# Allegro board Arduino_board.brd
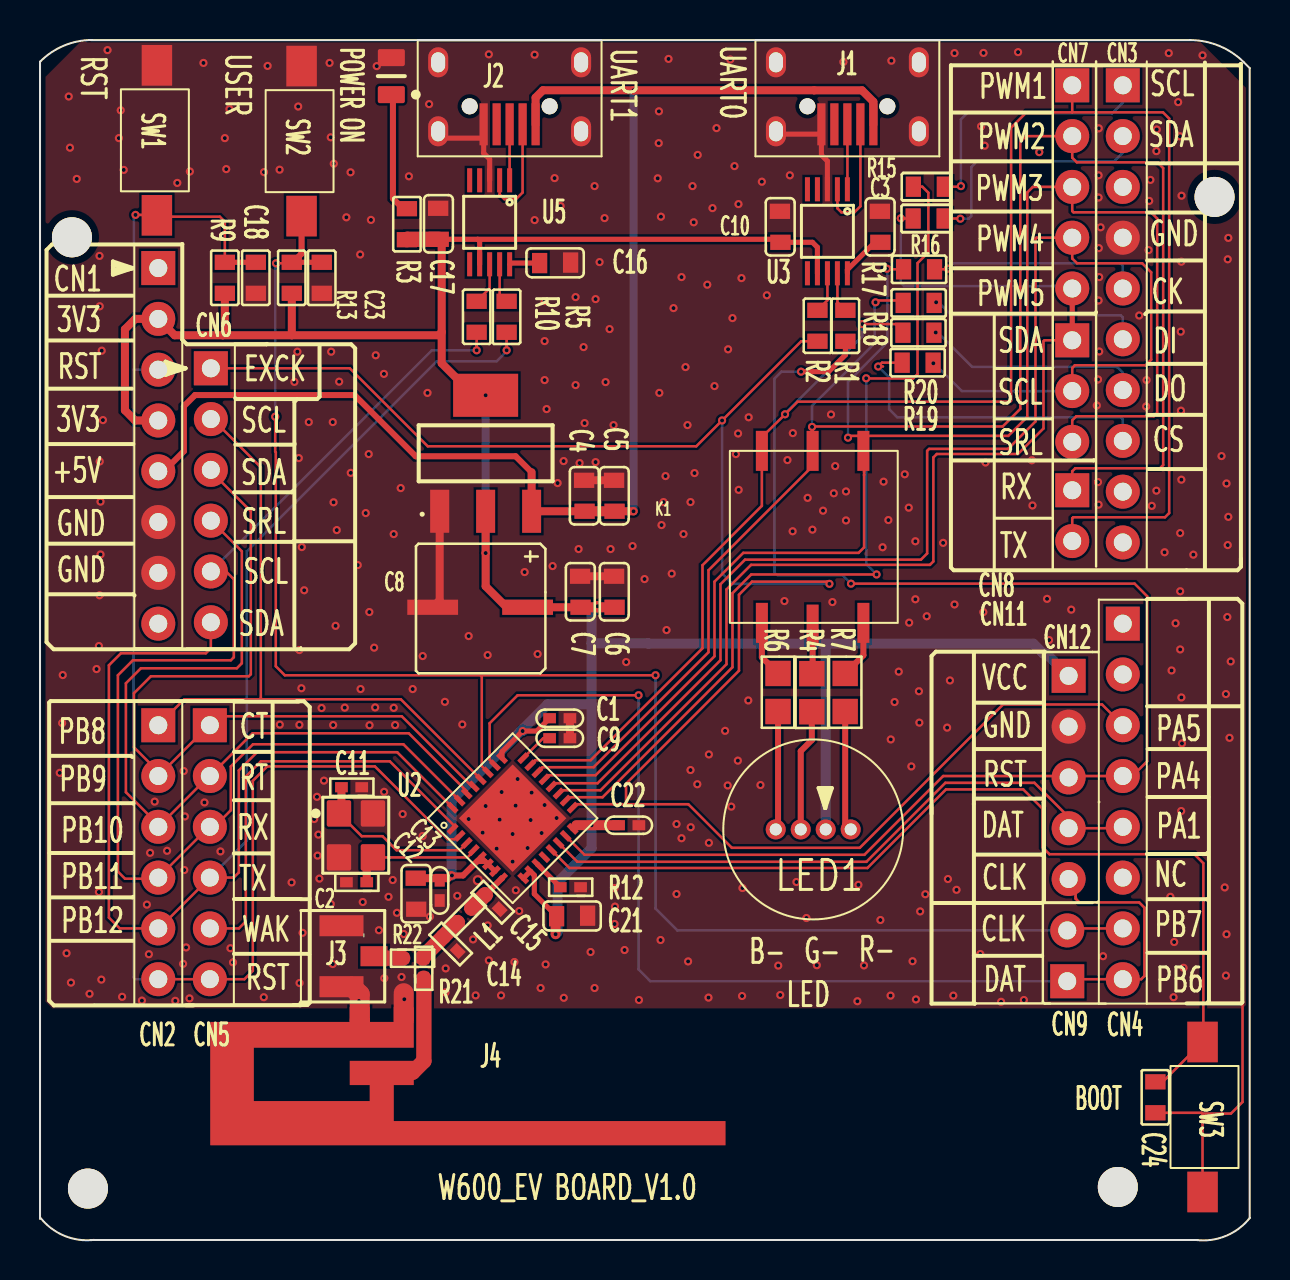
[diagram p0: board, top side]
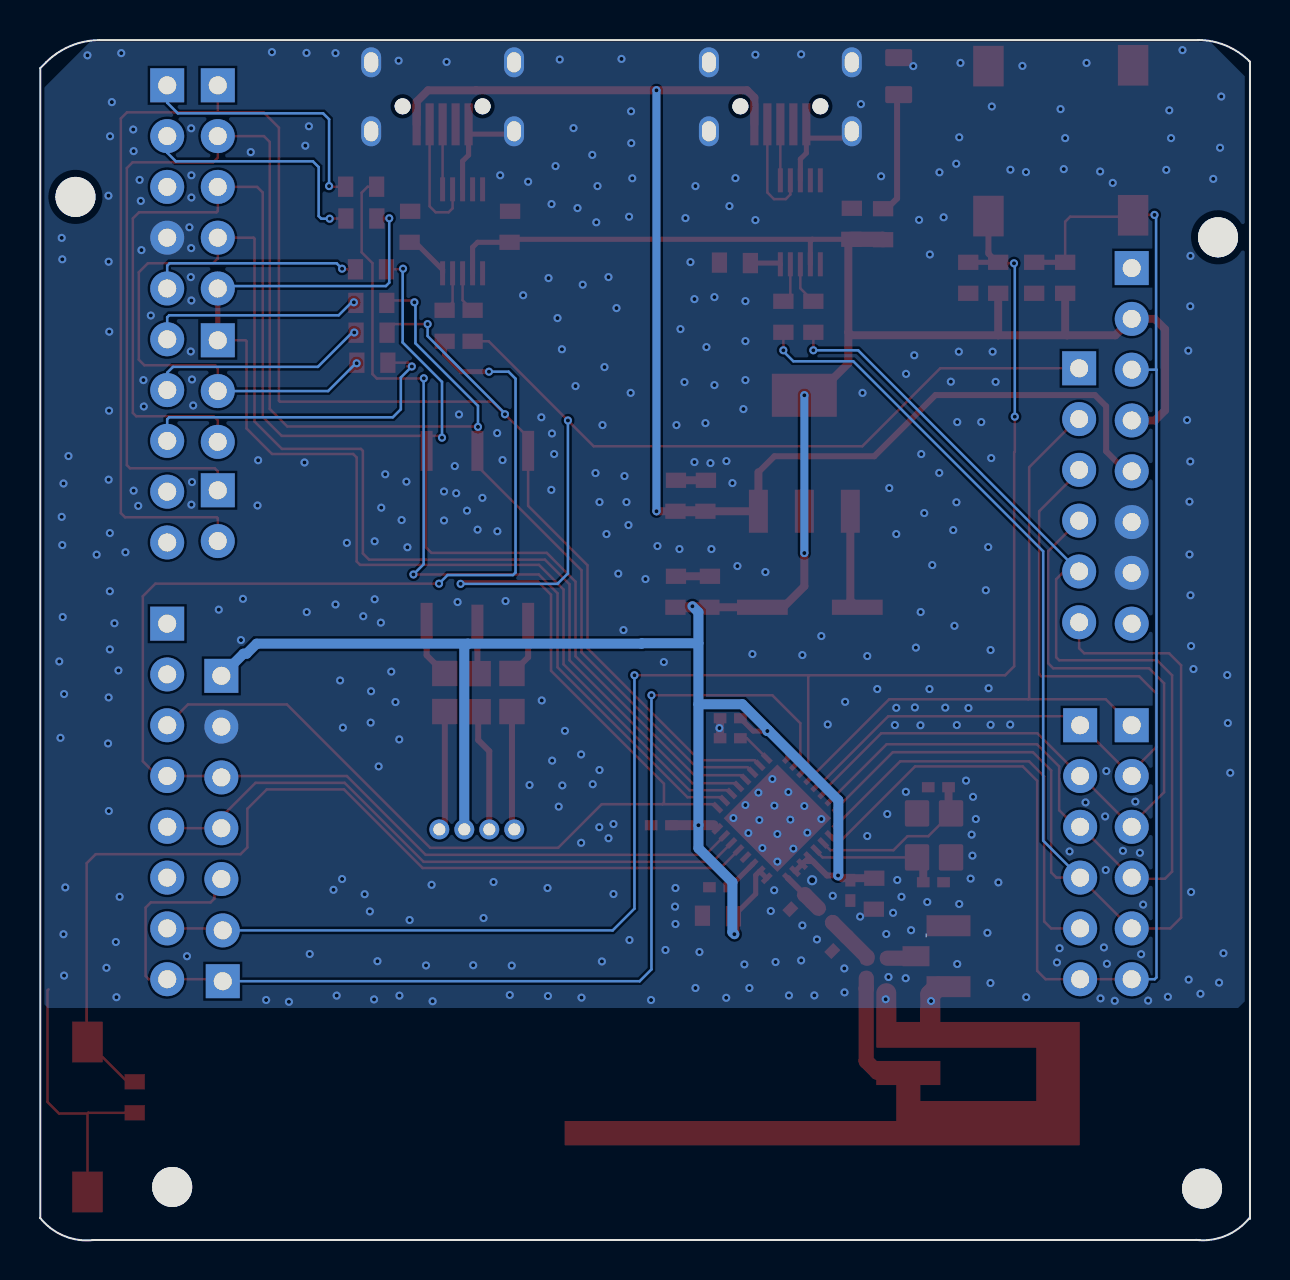
[diagram p1: board, bottom side, seen from below]

Outline 60.55 x 60.01 mm; copper layers: TOP, BOTTOM. Coordinates in mm from the lower left corner of the outline.
Outline path: 0,1.06 arc(0,1.07) 0,1.07 0,58.92 0.02,58.94 arc(1.21,59.73) 2.61,60.01 ; 2.55,60 57.55,60 arc(59.01,59.71) 60.25,58.88 60.53,58.6 60.53,1.09 ; 2.71,0.01 arc(1.22,0.21) 0.01,1.12 ; 2.55,0 57.93,0 ; 57.45,0 57.85,0 arc(59.34,0.21) 60.55,1.12

## Placement (name value [footprint] x y rotation side)
C1  1uF  [C0402]  25.5 26.09 0 top
C2  15pF  [R0402]  16.35 17.89 180 top
C3  1uF  [C0603]  42.05 49.89 90 top
C4  10uF  [C0603]  27.25 36.44 90 top
C5  1uF  [C0603]  28.75 36.44 90 top
C6  10uF  [C0603]  28.75 31.64 90 top
C7  0.1uF  [C0603]  27.05 31.64 90 top
C8  330uF  [C6_11]  24.4 31.64 270 top
C9  1uF  [C0402]  25.5 25.09 0 top
C10  1uF  [C0603]  37.05 49.89 90 top
C11  15pF  [R0402]  16.1 22.64 180 top
C12  10uF  [C0603]  18.8 18.09 270 top
C13  4.7nF  [C0402]  20 17.99 270 top
C14  0.75pF  [R0402]  20.9 14.45 135 top
C15  0.75pF  [R0402]  23 16.54 135 top
C16  1uF  [C0603]  25 48.85 0 top
C17  1uF  [C0603]  19.95 50.04 90 top
C18  0.1uF  [R0603]  10.8 47.34 90 top
C21  47uF  [C0603]  25.85 16.19 0 top
C22  1uF  [C0402]  28.95 20.74 0 top
C23  0.1uF  [R0603]  14.1 47.34 90 top
C24  0.1uF  [R0603]  55.81 6.36 90 top
CN1  8HEADER  [HDR254M-1X8]  5.92 48.6 270 top
CN2  6 HEADER  [HDR254M-1X6]  5.92 25.74 270 top
CN3  CON10  [HDR254M-1X10]  54.18 57.74 270 top
CN4  8 HEADER  [HDR254M-1X8]  54.18 30.82 270 top
CN5  6 HEADER  [HDR254M-1X6]  8.5 25.74 270 top
CN6  6 HEADER  [HDR254M-1X6]  8.55 43.59 270 top
CN7  CON5  [HDR254M-1X5]  51.65 57.74 270 top
CN8  CON3  [HDR254M-1X3]  51.65 44.99 270 top
CN9  CON2  [HDR254M-1X2]  51.4 12.94 90 top
CN11  CON2  [HDR254M-1X2]  51.65 37.49 270 top
CN12  CON5  [HDR254M-1X5]  51.47 28.21 270 top
D1  LED  [LEDC2012X120]  17.58 58.2 90 top
J1  micro USB  [MICRO-USB]  40.4 55.79 180 top
J2  micro USB  [MICRO-USB]  23.5 55.79 180 top
J3  -  [TC35]  15.85 14.19 180 top
J4  TC35  [IFA_TI1]  21.41 8.19 180 top
K1  SWITCH_3  [SWITCH3_2]  36.12 39.46 0 top
L1  2.2nH  [R0402]  21.6 16.59 225 top
LED1  RGB  [RGB_LED]  38.69 20.53 180 top
NOREF  -  [unnamed]  1.6 50.14 0 top
NOREF#2  -  [unnamed]  58.77 52.16 0 top
NOREF#3  -  [unnamed]  2.4 2.57 0 top
NOREF#4  -  [unnamed]  53.93 2.65 0 top
R1  33  [R0603]  40.3 44.94 90 top
R2  33  [R0603]  38.9 46.49 270 top
R3  1.5K  [R0603]  18.36 51.57 270 top
R4  15R  [R0805]  38.62 28.32 270 top
R5  33  [R0603]  23.35 45.39 90 top
R6  15R  [R0805]  36.93 28.33 270 top
R7  15R  [R0805]  40.29 28.33 270 top
R9  4.7K  [R0603]  9.25 47.34 90 top
R10  33  [R0603]  21.85 46.94 270 top
R12  24K_1%  [R0402]  27.05 17.64 180 top
R13  4.7K  [R0603]  12.6 47.34 90 top
R15  1.5K  [R0603]  45.25 52.67 180 top
R16  1.5K  [R0603]  45.24 51.08 180 top
R17  1.5K  [R0603]  44.76 48.54 180 top
R18  1.5K  [R0603]  44.74 46.86 180 top
R19  1.5K  [R0603]  43.14 43.87 0 top
R20  1.5K  [R0603]  44.73 45.37 180 top
R21  000  [R0402]  19.2 13.09 90 top
R22  000  [R0402]  18.15 14.09 0 top
SW1  SW PUSHBUTTON  [SW4]  5.85 51.24 90 top
SW2  SW PUSHBUTTON  [SW4]  13.09 51.2 90 top
SW3  SW PUSHBUTTON  [SW4]  58.17 9.9 270 top
U1  W600_32pin  [W600-QFN32]  23.65 21.09 45 top
U2  XTAL_40MHz  [OSCCC250X320X110]  15.95 20.04 0 top
U3  CH340E  [MSOP10]  40.4 52.54 270 top
U4  AMS117  [SOT-223]  22.3 39.34 0 top
U5  CH340E  [MSOP10]  23.5 52.99 270 top

## Library data of the parts
C1-C7 C9-C18 C21-C24 = CAP NP
C8 = C_0: room: PWR
CN1 CN4 = CON8
CN2 CN5 CN6 = CON6
CN3 = CON10
CN7 CN12 = CON5
CN8 = CON3
CN9 CN11 = CON2
D1 = LED_1: User Part Number: pn; Tolerance: RichardLC
J1 J2 = CON7_2
J3 J4 = TC35
K1 = SWITCH_1
L1 = INDUCTOR
LED1 = RGB_0
R1-R7 R10 R15-R20 = R
R9 R12 R13 R21 R22 = R: room: FPGA_BANK3_4_CLK
SW1-SW3 = SW PUSHBUTTON_0
U1 = W600_1
U2 = OSC44M_0
U3 U5 = CH340E
U4 = AMS117

## Footprints (pads in the part's own frame, mm; a bottom-side part is the same pattern mirrored in y, then rotated)
C6_11
  rect 0.762x2.54 smd: 1(0,0) 2(0,-4.75)
C0402
  rect 0.635x0.508 smd: 1(0,0) 2(1.016,0)
C0603
  rect 0.762x1.016 smd: 1(0,0) 2(1.549,0.025)
HDR254M-1X2
  rect 1.7x1.7 hole 0.9: 1(0,0)
  round 1.7 hole 0.9: 2(2.54,0)
HDR254M-1X3
  rect 1.7x1.7 hole 0.9: 1(0,0)
  round 1.7 hole 0.9: 2(2.54,0) 3(5.08,0)
HDR254M-1X5
  rect 1.7x1.7 hole 0.9: 1(0,0)
  round 1.7 hole 0.9: 2(2.54,0) 3(5.08,0) 4(7.62,0) 5(10.16,0)
HDR254M-1X6
  rect 1.7x1.7 hole 0.9: 1(0,0)
  round 1.7 hole 0.9: 2(2.54,0) 3(5.08,0) 4(7.62,0) 5(10.16,0) 6(12.7,0)
HDR254M-1X8
  rect 1.7x1.7 hole 0.9: 1(0,0)
  round 1.7 hole 0.9: 2(2.54,0) 3(5.08,0) 4(7.62,0) 5(10.16,0) 6(12.7,0) 7(15.24,0) 8(17.78,0)
HDR254M-1X10
  rect 1.7x1.7 hole 0.9: 1(0,0)
  round 1.7 hole 0.9: 2(2.54,0) 3(5.08,0) 4(7.62,0) 5(10.16,0) 6(12.7,0) 7(15.24,0) 8(17.78,0) 9(20.32,0) 10(22.86,0)
IFA_TI1
  rect 0.508x0.432 smd: 1(4.14,-0.18) 2(3.21,-2.8) 3(5.4,-2.78)
LEDC2012X120
  custom 0.85x1.35 smd: A(0.925,0) C(-0.925,0)
MICRO-USB
  round 0.8 hole 0.8 unplated: (-2,-0.9) (2,-0.9)
  rect 0.41x2.1 smd: 1(-1.3,0) 2(-0.65,0) 3(0,0) 4(0.65,0) 5(1.3,0)
  oval 1x1.5 hole 0.7x1: 6(-3.575,0.35) 7(3.575,0.35) 8(-3.575,-3.1) 9(3.575,-3.1)
MSOP10
  rect 1.2x0.25 smd: 1(0,0) 2(0,-0.5) 3(0,-1) 4(0,-1.5) 5(0,-2) 6(4.2,-2) 7(4.2,-1.5) 8(4.2,-1) 9(4.2,-0.5) 10(4.2,0)
OSCCC250X320X110
  custom 1.22x1.32 smd: 1(-0.99,1.29) 2(-0.99,-0.91) 3(0.71,-0.91) 4(0.71,1.29)
R0402
  rect 0.635x0.508 smd: 1(0,0) 2(1.016,0)
R0603
  rect 0.762x1.016 smd: 1(0,0) 2(1.549,0)
R0805
  rect 1.27x1.27 smd: 1(0,0) 2(1.905,0)
RGB_LED
  round 1 hole 0.6: 1(-1.875,0) 2(-0.625,0) 3(0.625,0) 4(1.875,0)
SOT-223
  rect 0.95x2.15 smd: 1(-2.3,-2.9) 2(0,-2.9) 3(2.3,-2.9)
  rect 3.25x2.15 smd: 4(0,2.9)
SW4
  rect 2.032x1.524 smd: 1(0,0) 2(7.5,0)
SWITCH3_2
  rect 0.6x2 smd: 1(0,0) 2(2.54,0) 3(5.08,0) 4(5.08,-8.6) 5(2.54,-8.69) 6(0,-8.6)
TC35
  rect 1.35x1 smd: 1(-0.864,0)
  rect 2.2x1.05 smd: 2(0.762,-1.524) 3(0.762,1.524)
unnamed
  round 2 hole 2.3 unplated: (0,0)
W600-QFN32
  rect 0.6x0.25 smd: 1(-2.5,1.75) 2(-2.5,1.25) 3(-2.5,0.75) 4(-2.5,0.25) 5(-2.5,-0.25) 6(-2.5,-0.75) 7(-2.5,-1.25) 8(-2.5,-1.75) 17(2.5,-1.75) 18(2.5,-1.25) 19(2.5,-0.75) 20(2.5,-0.25) 21(2.5,0.25) 22(2.5,0.75) 23(2.5,1.25) 24(2.5,1.75)
  rect 0.25x0.6 smd: 9(-1.75,-2.5) 10(-1.25,-2.5) 11(-0.75,-2.5) 12(-0.25,-2.5) 13(0.25,-2.5) 14(0.75,-2.5) 15(1.25,-2.5) 16(1.75,-2.5) 25(1.75,2.5) 26(1.25,2.5) 27(0.75,2.5) 28(0.25,2.5) 29(-0.25,2.5) 30(-0.75,2.5) 31(-1.25,2.5) 32(-1.75,2.5)
  rect 3.8x3.8 smd: 33(0,0)

## Nets
+5V: C4.1 C5.1 CN1.5 J1.1 J2.1 U4.3(VIN)
GND: C1.2 C2.2 C3.2 C4.2 C5.2 C6.2 C7.2 C8.2 C9.2 C10.2 C11.1 C12.2 C13.2 C14.1 C15.1 C16.2 C17.2 C18.1 C21.2 C22.2 C23.1 C24.1 CN1.6 CN1.7 CN3.4 CN12.2 D1.A J1.5 J1.6 J1.7 J1.8 J1.9 J2.5 J2.6 J2.7 J2.8 J2.9 J3.2(GND1) J3.3(GND2) J4.2(GND1) J4.3(GND2) R12.1 SW1.2 SW2.2 SW3.2 U1.33(GND) U2.2(GND1) U2.4(GND2) U3.3(GND) U4.1(GND) U5.3(GND)
VCC_33: C1.1 C6.1 C7.1 C8.1 C10.1 C12.1 C13.1 C17.1 C21.1 C22.1 CN1.2 CN1.4 CN12.1 LED1.2(COM) R3.2 R9.1 R13.1 U1.5(VDD33) U1.6(DVDD33) U1.7(VDD33LNA) U1.9(VDD33PA) U1.10(VDD33ANA) U1.16(VDD33IO_2) U1.25(VDD33IO_1) U3.7(VCC) U4.2(VOUT) U4.4(VO) U5.7(VCC)
VIN: CN1.8
ANT: J4.1(IN) R21.1
I2C_SCL: CN3.1 R15.1
I2C_SCL_1: CN2.4 CN5.3 CN6.5 R10.2 U1.31(GPIOPB11)
I2C_SDA: CN3.2 R16.1
I2C_SDA_1: CN2.5 CN5.4 CN6.6 R5.1 U1.32(GPIOPB12)
I2S_M_EXTCLK: CN4.3 CN6.1 R2.2 U1.17(GPIOPA5)
I2S_M_SCL: CN2.1 CN6.2 U1.28(GPIOPB8)
I2S_M_SDA: CN2.2 CN5.1 CN6.3 U1.29(GPIOPB9)
I2S_M_SRL: CN2.3 CN5.2 CN6.4 U1.30(GPIOPB10)
I2S_S_SCL: CN7.3 CN8.3 K1.3 R17.2 U1.21(GPIOPB16)
I2S_S_SDA: CN7.5 CN8.1 R16.2 U1.19(GPIOPB14)
I2S_S_SRL: CN7.4 CN8.2 R19.2 U1.20(GPIOPB15)
PA_0: C24.2 SW3.1 U1.13(GPIOPA0)
PA_1: CN4.5 CN12.4 U1.14(GPIOPA1)
PA_4: CN4.4 CN12.3 R1.1 U1.15(GPIOPA4)
PB_6: CN4.8 CN9.1 CN12.5 U1.26(GPIOPB6)
PB_7: C23.2 CN4.7 CN9.2 R13.2 SW2.1 U1.27(GPIOPB7)
PB_13: R15.2 U1.18(GPIOPB13)
PB_17: CN7.2 CN11.1 K1.2 R18.2 U1.22(GPIOPB17)
PB_18: CN7.1 CN11.2 K1.1 R20.2 U1.23(GPIOPB18)
RESET: C18.2 CN1.3 CN2.6 CN5.6 R9.2 SW1.1 U1.2(RESET)
SPI_CK: CN3.5 R17.1
SPI_CS: CN3.8 R19.1
SPI_DI: CN3.6 R18.1
SPI_DO: CN3.7 R20.1
UD0+: J1.3 U3.1(UD+)
UD0-: J1.2 U3.2(UD-)
UD1+: J2.3 U5.1(UD+)
UD1-: J2.2 U5.2(UD-)
WAKEUP: CN5.5 U1.1(WAKEUP)
XTAL_IN: C2.1 U1.4(XTAL-IN) U2.3(OUT2)
XTAL_OUT: C11.2 U1.3(XTAL-OUT) U2.1(OUT1)
N16442727: C15.2 L1.1 U1.8(ANT)
N16443297: C14.2 L1.2 R21.2 R22.2
N16465015: C9.1 U1.24(CAP)
N16680375: D1.C R3.1
N16680970: R1.2 U3.9(RXD)
N16680974: R2.1 U3.8(TXD)
N16683332: C3.1 U3.10(V3)
N16684582: R5.2 U5.9(RXD)
N16684586: R10.1 U5.8(TXD)
N16684696: C16.1 U5.10(V3)
N16695887: CN4.6
N16695911: CN4.2
N16695915: CN4.1
N16715753: J3.1(IN) R22.1
N16727459: K1.5 R4.1
N16727471: LED1.3(G-) R4.2
N16730113: K1.4 R7.1
N16730133: K1.6 R6.1
N16730206: LED1.4(B-) R6.2
N16730210: LED1.1(R-) R7.2
N1644257910: R12.2 U1.11(EXT24K)

Pads without a net: CN1 1; CN3 3 9 10; J1 4; J2 4; U1 12; U3 4 5 6; U5 4 5 6

## Via types
v1: diameter 0.406, hole 0.203, TOP to BOTTOM, 419 vias
v2: diameter 0.508, hole 0.305, TOP to BOTTOM, 1 via

## Routing (per net, layer and track width the routed paths; a pad name or vN(x,y) marks a point on that pad's centre or on a via; arc(x,y) is an arc through that point)
+5V: length 71
  TOP w0.3: 24.6,38.39 23.8,39.19 18.8,39.19 15.74,42.25 7.76,42.25 7.2,41.69 7.2,39.44 6.2,38.44 CN1.5
  TOP w0.4: 29.7,57.49 25.17,57.49 24.8,57.13 J2.1 ; 29.7,57.49 38.73,57.49 38.74,57.49 41.13,57.49 41.7,56.92 J1.1 ; 29.7,57.49 v1(29.7,57.49) ; 24.6,38.39 U4.3 C4.1 ; C5.1 v1(29.7,36.44)
  TOP w0.5: C5.1 C4.1
  BOTTOM w0.4: v1(29.7,36.44) v1(29.7,57.49)
GND: length 41.2
  TOP w0.127: 58.17,6.32 SW3.2 ; 58.17,6.32 58.13,6.36 C24.1 ; 58.17,6.32 59.59,6.32 60.17,6.9 60.17,12.48 60.12,12.53 ; 24.31,21.75 U1.33 ; U1.33 22.94,21.8 ; U1.33 23.61,21.05 ; U1.33 24.4,20.34
  TOP w0.254: J2.7 20.27,55.1 22.2,55.1 ; J1.7 36.96,55.3 39.1,55.3 ; 22.2,55.1 J2.5 ; 22.2,55.1 22.2,54.35 22.5,54.05 U5.3 ; U3.3 39.4,53.95 39.1,54.25 39.1,55.3 ; 39.1,55.3 J1.5
  TOP w0.4: C1.2 C9.2 ; C4.2 C5.2 ; C8.2 20,31.99 U4.1 ; C7.2 C6.2
  TOP w1: J4.2 18.2,12.34 ; J3.3 15.61,12.67 16,12.28 16,10.98 J4.3
  vias: v1(0.99,23.36) v1(1.14,28.25) v1(1.11,25.85) v1(1.33,14.34) v1(1.44,57.18) v1(1.5,54.62) v1(1.55,12.87) v1(1.84,53.06) v1(2.48,12.31) v1(2.83,28.55) v1(2.98,49.21) v1(2.99,46.69) v1(2.99,38.93) v1(2.98,32.24) v1(2.95,29.7) v1(2.95,17.4) v1(3.09,44.47) v1(3.03,36.92) v1(3.03,34.28) v1(3.07,13.02) v1(3.15,41) v1(3.38,59.5) v1(3.95,55.1) v1(4.04,56.49) v1(4.19,53.51) v1(4.11,12.16) v1(5.1,11.97) v1(5.35,16.77) v1(5.45,14.29) v1(5.51,19.36) v1(5.74,21.92) v1(6.36,19.46) v1(6.77,11.96) v1(6.87,52.86) v1(7.19,23.45) v1(7.16,13.81) v1(7.25,21.18) v1(7.22,18.5) v1(7.31,14.63) v1(7.48,12.08) v1(7.5,53.43) v1(8.18,58.86) v1(8.23,21.88) v1(9.03,19.43) v1(9.25,55.1) v1(9.32,53.55) v1(9.48,56.55) v1(9.53,14.59) v1(9.66,13.88) v1(11.21,53.4) v1(11.2,12.14) v1(11.39,58.71) v1(11.99,53.52) v1(12,25.77) v1(12.59,17.88) v1(12.73,42.91) v1(12.88,44.42) v1(12.92,56.68) v1(12.95,39.1) v1(12.98,29.5) v1(12.98,25.76) v1(12.99,12.85) v1(13.08,27.59) v1(13.1,34.65) v1(13.14,15.36) v1(13.22,32.49) v1(13.45,40.9) v1(13.72,21.05) v1(13.86,22.16) v1(13.89,19.22) v1(13.93,20.27) v1(13.98,18.07) v1(14.09,26.6) v1(14.21,22.97) v1(14.49,58.86) v1(14.55,55.14) v1(14.57,44.42) v1(14.55,16.8) v1(14.65,40.9) v1(14.69,36.89) v1(14.67,25.75) v1(14.65,13.8) v1(14.7,53.82) v1(14.79,30.71) v1(14.85,35.5) v1(14.97,42.92) v1(15.25,26.62) v1(15.33,51.14) v1(15.54,53.39) v1(15.55,38.36) v1(15.9,33.75) v1(15.96,11.95) v1(16.02,49.28) v1(16.04,27.55) v1(16.15,16.9) v1(16.3,36.35) v1(16.45,39.3) v1(16.48,31.4) v1(16.49,25.74) v1(16.56,51.01) v1(16.8,44.24) v1(16.72,29.62) v1(16.77,26.63) v1(16.85,58.7) v1(16.96,15.49) v1(17.21,43.31) v1(17.22,22.41) v1(17.23,13.09) v1(17.44,17.16) v1(17.65,18) v1(17.7,35.3) v1(17.7,26.61) v1(17.77,25.75) v1(17.86,16.36) v1(18.05,37.6) v1(18.09,13.15) v1(18.15,21.3) v1(18.2,15.3) v1(18.23,12.04) v1(18.46,53.19) v1(18.65,27.55) v1(19.15,29.2) v1(19.15,20.2) v1(19.39,42.36) v1(19.47,56.8) v1(19.51,16.17) v1(20.26,26.91) v1(20.29,12.38) v1(20.3,13.58) v1(20.88,17.21) v1(21.13,25.78) v1(21.45,30.2) v1(21.45,21.05) v1(21.67,15.03) v1(21.8,12.23) v1(22.15,20.37) v1(22.3,21.7) v1(22.46,59.29) v1(22.4,29.25) v1(22.4,15.73) v1(22.46,13.98) v1(22.85,19.57) v1(23,21.02) v1(23.07,12.23) v1(23.1,22.4) v1(23.65,20.3) v1(23.65,18.92) v1(23.74,13.9) v1(23.8,21.72) v1(23.81,17.49) v1(23.9,23.05) v1(23.98,16.45) v1(24.25,33.4) v1(24.4,19.6) v1(24.55,21) v1(24.6,22.37) v1(24.75,59.27) v1(24.75,51) v1(24.9,29.3) v1(25.05,12.6) v1(25.1,20.35) v1(25.25,46.95) v1(25.25,44.95) v1(25.25,43) v1(25.25,21.75) v1(25.35,41.55) v1(25.3,13.78) v1(25.65,33.7) v1(25.75,53.1) v1(25.85,21.1) v1(25.9,37.85) v1(26.05,51.7) v1(26.2,38.95) v1(26.21,12.11) v1(26.55,25.6) v1(26.8,47.15) v1(26.8,42.75) v1(27,38.85) v1(26.95,34.55) v1(27.2,44.65) v1(27.25,40.85) v1(27.55,14.4) v1(27.75,52.7) v1(27.8,47.05) v1(27.8,38.9) v1(27.75,12.6) v1(28,48.9) v1(28.25,51.1) v1(28.3,42.9) v1(28.5,45.55) v1(28.55,34.55) v1(28.7,40.75) v1(28.75,17.6) v1(28.77,16.67) v1(28.75,15.8) v1(29.25,14.5) v1(29.33,28.9) v1(29.65,34.7) v1(29.97,12) v1(30.25,33.05) v1(30.97,56.44) v1(30.96,54.85) v1(30.91,53.09) v1(30.99,42.36) v1(31.07,51.17) v1(31.05,15) v1(31.2,36.9) v1(31.1,35.75) v1(31.3,38.2) v1(31.35,30.5) v1(31.45,59.06) v1(31.7,46.6) v1(31.61,33.32) v1(31.85,20.8) v1(31.85,17.3) v1(32.1,48.15) v1(32.2,35.3) v1(32.1,20.09) v1(32.3,43.65) v1(32.4,40.75) v1(32.43,13.93) v1(32.55,36.9) v1(32.55,23.5) v1(32.56,20.64) v1(32.65,52.7) v1(32.71,50.89) v1(32.75,38.35) v1(32.89,22.79) v1(32.91,54.26) v1(33.39,47.77) v1(33.47,24.28) v1(33.47,19.86) v1(33.45,12.12) v1(33.65,51.6) v1(33.75,42.7) v1(33.85,55.6) v1(34.28,25.46) v1(34.43,44.54) v1(34.41,22.73) v1(34.54,59.03) v1(34.59,21.67) v1(34.65,46.1) v1(34.75,53.7) v1(34.82,39.3) v1(34.95,51.8) v1(34.93,40.33) v1(34.96,37.51) v1(34.92,23.97) v1(35.1,48.1) v1(35.15,17.6) v1(35.13,12.2) v1(35.46,41.14) v1(35.44,26.98) v1(36.05,22.75) v1(36.12,52.92) v1(36.37,47.24) v1(36.94,13.72) v1(37.04,12.25) v1(37.25,31.95) v1(37.4,39) v1(37.52,53.24) v1(37.67,40.35) v1(37.66,35.44) v1(37.85,17.9) v1(38.35,16.1) v1(38.41,37.11) v1(38.65,35.52) v1(38.87,13.74) v1(39.18,36.47) v1(39.58,41.28) v1(39.65,31.9) v1(39.79,38.7) v1(39.72,37.34) v1(40.2,58.91) v1(40.33,37.43) v1(40.33,35.98) v1(40.95,17.76) v1(40.9,11.94) v1(41.23,13.73) v1(42.05,16) v1(42.16,34.64) v1(42.21,37.92) v1(42.45,36) v1(42.6,58.97) v1(42.57,25.03) v1(42.56,12.22) v1(42.76,26.9) v1(42.97,28.42) v1(43.27,38.29) v1(43.47,36.62) v1(43.49,30.87) v1(43.6,23.68) v1(43.66,13.94) v1(43.8,34.94) v1(43.8,32.04) v1(43.83,12.03) v1(43.98,27.44) v1(44,25.87) v1(44.04,16.43) v1(44.37,31.19) v1(44.3,17.29) v1(45.19,34.86) v1(45.39,25.62) v1(45.43,18.05) v1(45.53,27.98) v1(45.7,12.22) v1(45.76,59.35) v1(45.76,31.78) v1(45.86,17.51) v1(47.09,55.69) v1(47.05,14.3) v1(47.2,31.4) v1(47.21,59.36) v1(47.27,54.72) v1(47.31,38.88) v1(48.09,11.91) v1(48.94,59.4) v1(49.23,12) v1(49.63,38.99) v1(49.66,36.73) v1(50,54.4) v1(50.39,32.06) v1(50.49,30) v1(51.6,31.52) v1(52.88,41.73) v1(52.98,55.59) v1(52.97,53.24) v1(52.97,52.13) v1(52.98,49.6) v1(52.97,46.98) v1(52.94,43.03) v1(52.94,37.9) v1(52.97,36.77) v1(53.07,50.64) v1(53,48.15) v1(53,44.43) v1(53.19,14.19) v1(55,46.23) v1(55.37,43) v1(55.35,41.68) v1(55.47,49.5) v1(55.56,53.01) v1(55.5,51.96) v1(55.63,36.71) v1(55.88,55.53) v1(55.86,54.45) v1(55.86,37.47) v1(56.27,34.39) v1(56.48,59.35) v1(56.56,17.16) v1(56.62,28.48) v1(56.75,14.9) v1(56.72,12.14) v1(56.82,30.84) v1(56.95,56.9) v1(57.04,55.19) v1(57.08,45.42) v1(57.09,41.47) v1(57.05,35.35) v1(57.05,32.44) v1(57.05,29.53) v1(57.1,21.45) v1(57.12,52.22) v1(57.11,48.92) v1(57.11,38.02) v1(57.11,27.13) v1(57.14,24.83) v1(57.22,13.61) v1(57.71,34.27) v1(58.17,59.24) v1(59.12,39.2) v1(59.28,17.63) v1(59.37,37.83) v1(59.34,27.3) v1(59.37,15.29) v1(59.34,13.22) v1(59.46,50.11) v1(59.43,49.04) v1(59.46,36.16) v1(59.43,34.75) v1(59.41,31.15) v1(59.58,28.93) v1(59.52,25.11) v2(21.91,17.99)
VCC_33: length 156.5
  TOP w0.254: U1.25 23.12,24.42 v1(24.15,25.45) 24.86,25.45 25.46,26.05 ; 21.9,50.04 22,49.94 U5.7 ; 21.9,50.04 C17.1 ; 21.9,50.04 36.9,50.04 C10.1 38.65,49.89 38.9,49.64 U3.7 ; U1.7 U1.6 22.28,18.93 ; 22.28,18.93 22.06,19.15 ; 22.28,18.93 21.87,18.93 ; U1.9 U1.10 24.73,18.24 24.73,17.31 C21.1 ; 26.84,20.74 U1.16
  TOP w0.3: v1(20.61,18.23) 21.17,18.23 21.87,18.93
  TOP w0.4: 20.1,45.4 20.1,49.89 C17.1 ; 20.1,45.4 19.94,45.24 12.6,45.24 ; 20.1,45.4 20.1,43.84 21.7,42.24 v1(22.3,42.24) ; C7.1 C8.1 23.35,31.64 22.3,32.69 v1(22.3,34.35) U4.2 ; C12.1 19.9,18.09 C13.1 20.1,18.09 20.4,18.09 20.54,18.23 v1(20.61,18.23) ; R9.1 9.25,45.34 9.15,45.24 ; 25.46,26.05 C1.1 ; 9.15,45.24 6.74,45.24 CN1.2 4.77,46.06 4.25,45.54 4.25,41.49 4.76,40.98 CN1.4 ; 9.15,45.24 12.6,45.24 ; 12.6,45.24 R13.1
  TOP w0.5: C22.1 v1(27.6,20.74) 26.84,20.74 ; C7.1 27.85,31.64 v1(27.9,31.69) 27.95,31.64 C6.1 ; C21.1 25.8,16.14 v1(25.8,15.29)
  TOP w0.762: R3.2 18.38,50.04 C17.1
  BOTTOM w0.4: v1(22.3,34.35) v1(22.3,42.24)
  BOTTOM w0.5: 27.6,26.79 25.4,26.79 24.15,25.54 v1(24.15,25.45) 24.06,25.45 20.6,21.99 20.6,18.24 v1(20.61,18.23) ; 27.6,26.79 27.6,29.84 ; 27.6,26.79 v1(27.6,20.74) 27.6,19.59 25.9,17.89 25.9,15.39 v1(25.8,15.29) ; 39.14,29.82 49.71,29.82 50.21,29.32 50.36,29.32 CN12.1 ; 39.14,29.82 30.45,29.82 30.42,29.84 27.6,29.84 ; 39.14,29.82 39.31,29.64 LED1.2 ; 27.6,29.84 27.6,31.39 v1(27.9,31.69)
ANT: length 6.3
  TOP w0.762: R21.1 19.2,12.58 19.21,12.57 19.21,8.95 18.65,8.39 17.29,8.39 J4.1
I2C_SCL: length 13.6
  TOP w0.127: 46.19,52.69 46.18,52.7 v1(46.08,52.7) 46.05,52.67 R15.1
  BOTTOM w0.127: v1(46.08,52.7) 46.08,56.04 46.38,56.34 53.65,56.34 54.18,56.87 CN3.1
I2C_SCL_1: length 62.5
  TOP w0.127: CN6.5 9.31,33.43 9.7,33.04 9.7,29.14 9.55,28.99 4.65,28.99 3.9,28.24 3.9,18.42 4.25,18.07 5.87,18.07 CN2.4 8.46,20.66 CN5.3 8.72,20.66 9.55,21.49 9.55,23.68 10.66,24.79 18.18,24.79 U1.31 ; R10.2 v1(21.85,44.49)
  BOTTOM w0.127: v1(21.85,44.49) 19.61,44.49 CN6.5
I2C_SDA: length 12.6
  TOP w0.127: R16.1 46.04,51.08 v1(46.05,51.07)
  BOTTOM w0.127: v1(46.05,51.07) 46.47,51.07 46.6,51.2 46.6,53.65 46.89,53.94 53.75,53.94 54.18,54.37 CN3.2
I2C_SDA_1: length 79.8
  TOP w0.127: R5.1 v1(23.35,44.49) ; U1.32 17.88,24.39 10.86,24.39 9.95,23.48 9.95,18.38 9.69,18.12 CN5.4 5.96,15.58 CN2.5 3.99,15.58 3.45,16.12 3.45,28.74 4.05,29.34 8.3,29.34 8.55,29.59 CN6.6
  BOTTOM w0.127: CN5.4 10.35,19.97 10.35,34.44 19.85,43.94 22.85,43.94 23.35,44.44 v1(23.35,44.49)
I2S_M_EXTCLK: length 97
  TOP w0.127: v1(39.5,32.81) 39.39,32.92 35.63,32.92 34.97,32.27 34.97,28.47 29.32,22.82 29.32,21.87 29.4,21.79 ; 29.4,21.79 32.44,21.79 34.62,19.61 41.02,19.61 48.19,26.78 53.14,26.78 CN4.3 ; 29.4,21.79 26.82,21.79 U1.17 ; R2.2 38.09,44.94 v1(34.13,40.98) 32.84,39.69 19.4,39.69 15.5,43.59 CN6.1
  BOTTOM w0.127: v1(34.13,40.98) 34.13,33.33 34.65,32.81 v1(39.5,32.81)
I2S_M_SCL: length 33.5
  TOP w0.127: 22.06,23.04 18.05,27.04 11.1,27.04 ; 11.1,27.04 7.22,27.04 CN2.1 ; 11.1,27.04 11.05,27.09 11.05,38.64 8.64,41.05 CN6.2
I2S_M_SDA: length 40.4
  TOP w0.127: CN6.3 8.55,38.44 10.55,36.44 10.55,28.29 10.45,28.19 5.55,28.19 4.7,27.34 4.7,24.64 5.92,23.42 CN2.2 8.46,25.74 CN5.1 8.95,26.19 18.1,26.19 21.61,22.68 U1.29
I2S_M_SRL: length 40.5
  TOP w0.127: U1.30 21.35,22.44 18.45,25.34 10.64,25.34 CN5.2 8.46,23.2 CN2.3 5.92,20.77 4.3,22.39 4.3,27.84 5.05,28.59 9.85,28.59 10.1,28.84 10.1,34.44 8.57,35.97 CN6.4
I2S_S_SCL: length 82.5
  TOP w0.127: 41.22,40.21 48.45,40.21 49.4,41.16 49.4,52.38 49.68,52.66 CN7.3 51.65,51.45 51.71,51.39 55.59,51.39 55.9,51.08 55.9,41.36 55.73,41.19 51.85,41.19 51.65,40.99 CN8.3 ; 41.22,40.21 41.2,40.19 K1.3 41.23,39.43 41.23,38.42 41.24,38.41 41.24,38.27 41.23,38.25 41.23,34.64 40.96,34.36 35.19,34.36 33.75,32.92 33.75,29.19 27.8,23.24 25.45,23.24 25.24,23.04 ; 41.22,40.21 40.52,40.21 v1(40.43,40.12) ; R17.2 42.41,48.54 v1(42.38,48.57)
  BOTTOM w0.127: v1(40.43,40.12) 40.43,42.91 42.4,44.88 42.4,48.55 v1(42.38,48.57)
I2S_S_SDA: length 58
  TOP w0.127: R16.2 43.08,51.08 v1(43.07,51.09) ; U1.19 26.11,22.49 28.05,22.49 34.35,28.79 34.35,32.53 35.58,33.76 44.53,33.76 44.7,33.93 44.7,39.13 44.87,39.31 48.93,39.31 50.21,40.58 50.21,44.94 50.26,44.99 CN8.1
  TOP w0.254: CN7.5 CN8.1
  BOTTOM w0.127: CN7.5 51.53,47.7 43.24,47.7 43.07,47.87 v1(43.07,51.09)
I2S_S_SRL: length 70.5
  TOP w0.127: v1(44.7,43.84) 44.7,43.86 R19.2 ; CN8.2 51.65,43.61 51.78,43.74 55.32,43.74 55.6,44.02 55.6,48.39 55.15,48.84 51.89,48.84 51.65,49.08 CN7.4 49.86,50.12 49.81,50.07 49.81,40.93 48.44,39.56 44.49,39.56 44.39,39.46 44.39,34.33 44.08,34.02 35.28,34.02 34.05,32.79 34.05,28.99 27.9,22.84 25.75,22.84 U1.20
  BOTTOM w0.127: v1(44.7,43.84) 44.74,43.84 46.13,42.45 CN8.2
PA_0: length 49.4
  TOP w0.127: C24.2 56.18,7.91 SW3.1 58.21,9.94 58.21,18.84 57.76,19.29 50.51,19.29 50.17,19.63 50.17,21.56 49.2,22.53 45.33,22.53 41.4,18.6 26.49,18.6 25.59,19.5 U1.13
PA_1: length 31.6
  TOP w0.127: U1.14 26.89,18.91 41.35,18.91 45.3,22.86 49.76,22.86 51.47,21.15 CN12.4 54.11,20.59 CN4.5
PA_4: length 73.3
  TOP w0.127: v1(40.58,32.82) 54.77,32.82 55.4,32.19 55.4,23.94 54.66,23.2 CN4.4 51.54,23.2 ; 51.54,23.2 45.19,23.2 41.25,19.26 27.25,19.26 U1.15 ; 51.54,23.2 CN12.3
  TOP w0.254: R1.1 40.3,44.26 39.46,43.42 v1(38.08,43.42)
  BOTTOM w0.127: v1(38.08,43.42) 37.1,43.42 36.75,43.07 36.75,33.38 36.88,33.25 40.15,33.25 v1(40.58,32.82)
PB_6: length 57.8
  TOP w0.127: CN12.5 51.82,17.7 51.82,17.17 51.83,17.13 51.83,17.06 51.83,17.06 52.01,16.88 55,16.88 55.26,16.62 55.26,13.2 55.1,13.04 CN4.8 51.5,13.04 CN9.1 ; U1.26 22.5,24.01 22.5,25.84 23.9,27.24 v1(29.95,27.24)
  BOTTOM w0.127: CN9.1 30.54,12.94 29.95,13.53 v1(29.95,27.24)
PB_7: length 85.5
  TOP w0.127: U1.27 22.11,23.7 22.11,28.19 22.05,28.24 ; CN4.7 51.5,15.58 CN9.2 ; 13.09,49.41 12.52,48.84 v1(11.81,48.84) ; v1(30.8,28.24) 22.05,28.24 ; 22.05,28.24 12.25,28.24 11.8,28.69 11.8,39.39 11.77,39.42 v1(11.77,41.17)
  TOP w0.254: C23.2 12.66,48.89 ; R13.2 12.6,48.84
  TOP w0.3: R13.2 12.66,48.89 13.09,49.32 SW2.1
  BOTTOM w0.127: v1(11.77,41.17) 11.77,48.8 v1(11.81,48.84) ; CN9.2 31.89,15.48 30.8,16.57 v1(30.8,28.24)
PB_13: length 45.3
  TOP w0.127: v1(41.34,43.09) 41.35,43.08 43.69,43.08 43.91,43.3 43.91,48.85 44.45,49.39 44.45,52.37 44.15,52.67 R15.2 ; U1.18 26.47,22.14 28.15,22.14 34.65,28.64 34.65,32.34 35.59,33.28 v1(41.86,33.28)
  BOTTOM w0.127: v1(41.86,33.28) 41.35,33.79 41.35,43.08 v1(41.34,43.09)
PB_17: length 87.9
  TOP w0.127: v1(38.63,40.66) 38.63,38.67 33.45,33.49 33.45,29.39 27.7,23.64 25.14,23.64 U1.22 ; v1(38.63,40.66) 38.66,40.63 K1.2 ; v1(38.63,40.66) 38.65,40.68 48.17,40.68 49.05,41.56 49.05,54.91 49.34,55.2 CN7.2 51.65,54.12 51.88,53.89 55.91,53.89 56.2,53.6 56.2,38.75 56.04,38.59 51.8,38.59 51.65,38.44 CN11.1 ; R18.2 43.07,46.98 41.9,46.98 v1(41.81,46.89)
  BOTTOM w0.127: v1(41.81,46.89) 41.76,46.84 41.76,44.84 38.63,41.71 v1(38.63,40.66)
PB_18: length 93.6
  TOP w0.127: 51.65,56.39 CN7.1 ; 51.65,56.39 56.19,56.39 56.5,56.08 56.5,36.35 56.29,36.14 51.7,36.14 51.65,36.09 CN11.2 ; 51.65,56.39 49.36,56.39 48.59,55.62 48.59,41.97 48.54,41.92 37.91,41.92 v1(37.28,41.29) 37.28,41.28 36.13,40.16 K1.1 36.12,36.71 33.15,33.74 33.15,29.59 27.55,23.99 24.78,23.99 U1.23 ; v1(41.15,45.8) 42.81,45.8 43.18,45.43 R20.2
  BOTTOM w0.127: v1(37.28,41.29) 37.32,41.33 37.32,41.37 41.15,45.2 v1(41.15,45.8)
RESET: length 75.5
  TOP w0.127: U1.2 20.92,20.21 20.75,20.04 20.4,20.04 16.76,23.68 11.37,23.68 10.65,22.96 10.65,13.46 10.23,13.04 CN5.6 CN2.6 ; v1(4.78,51.26) 5.83,51.26 ; SW1.1 5.92,51.17 9,51.17 9.25,50.92 R9.2
  TOP w0.254: C18.2 R9.2
  TOP w0.3: 5.83,51.26 SW1.1
  BOTTOM w0.127: CN2.6 4.77,13.04 4.68,13.13 4.68,43.52 ; 4.68,43.52 4.7,43.54 4.7,51.18 v1(4.78,51.26) ; 4.68,43.52 CN1.3
SPI_CK: length 10.7
  TOP w0.127: R17.1 45.4,48.54 v1(45.43,48.57)
  BOTTOM w0.127: CN3.5 54.18,48.72 54.06,48.84 45.7,48.84 v1(45.43,48.57)
SPI_CS: length 16.9
  TOP w0.127: R19.1 42.13,43.87 v1(41.94,43.68) 42.18,43.68
  BOTTOM w0.127: CN3.8 54.18,41.04 54.08,41.14 42.89,41.14 42.49,41.54 42.49,43.13 v1(41.94,43.68)
SPI_DI: length 10.9
  TOP w0.127: R18.1 44.81,46.86 v1(44.84,46.89)
  BOTTOM w0.127: v1(44.84,46.89) 44.95,46.89 45.6,46.24 54.08,46.24 54.18,46.14 CN3.6
SPI_DO: length 11.2
  TOP w0.127: v1(44.82,45.38) 44.74,45.38 R20.1
  BOTTOM w0.127: v1(44.82,45.38) 44.83,45.39 44.91,45.39 46.64,43.66 53.89,43.66 54.18,43.37 CN3.7
UD0+: length 3.2
  TOP w0.127: J1.3 U3.1
UD0-: length 6.4
  TOP w0.127: J1.2 41.05,51.69 40.75,51.39 40.1,51.39 39.9,51.59 U3.2
UD1+: length 2.8
  TOP w0.127: J2.3 U5.1
UD1-: length 5.5
  TOP w0.127: U5.2 23,52.28 23.23,52.05 23.82,52.05 24.15,52.38 J2.2
WAKEUP: length 21.5
  TOP w0.127: CN5.5 9.95,15.58 10.3,15.93 10.3,23.18 11.06,23.94 17.5,23.94 20.73,20.71 20.73,20.64 U1.1
XTAL_IN: length 6.6
  TOP w0.127: U1.4 21.71,19.45 21.39,19.13 U2.3
  TOP w0.4: U2.3 16.35,18.82 C2.1
XTAL_OUT: length 8.7
  TOP w0.127: U1.3 21.35,19.84 21,19.49 17.84,19.49 17.14,20.19 16.1,20.19 U2.1
  TOP w0.4: U2.1 15.08,21.46 C11.2
N16442727: length 2.1
  TOP w0.3: C15.2 23.11,18.09 U1.8
  TOP w0.762: C15.2 22.27,17.26 L1.1
N16443297: length 2.5
  TOP w0.762: L1.2 20.88,15.87 C14.2 19.17,14.15 R22.2
N16465015: length 1.7
  TOP w0.127: C9.1 25.18,25.09 U1.24
N16680375: length 6.1
  TOP w0.3: R3.1 18.17,51.57 17.66,52.08 17.66,57.2 D1.C
N16680970: length 2
  TOP w0.127: U3.9 39.9,46.89 R1.2
N16680974: length 2.1
  TOP w0.127: R2.1 39.4,46.99 U3.8
N16683332: length 2.4
  TOP w0.254: C3.1 42,49.84 41.72,49.84 40.4,48.52 U3.10
N16684582: length 2
  TOP w0.127: R5.2 23,47.29 U5.9
N16684586: length 2.1
  TOP w0.127: R10.1 22.5,47.59 U5.8
N16684696: length 1.5
  TOP w0.254: C16.1 23.56,48.85 U5.10
N16715753: length 1.5
  TOP w0.762: R22.1 16.81,14.09 J3.1
N16727459: length 2.5
  TOP w0.3: R4.1 38.66,28.36 K1.5
N16727471: length 6.1
  TOP w0.3: R4.2 38.62,25 38.06,24.45 LED1.3
N16730113: length 2.9
  TOP w0.3: K1.4 41.2,29.24 R7.1
N16730133: length 2.9
  TOP w0.3: R6.1 36.12,29.14 K1.6
N16730206: length 5.9
  TOP w0.3: R6.2 36.93,20.65 LED1.4
N16730210: length 6
  TOP w0.3: LED1.1 40.29,20.81 R7.2
N1644257910: length 1.6
  TOP w0.254: U1.11 24.89,18.79 R12.2

## Copper pours and planes (outline as drawn; the poured copper is in the pictures)
GND on TOP: 2.35,59.89 58.07,59.89 60.34,57.62 60.34,11.75 60.17,11.58 0.62,11.58 0.28,11.92 0.28,58.17 2.02,59.91 2.33,59.91 ; 9 cut-outs
GND on BOTTOM: 2.33,59.91 58.05,59.91 60.32,57.64 60.32,11.77 60.15,11.6 0.6,11.6 0.26,11.94 0.26,58.19 2,59.93 2.31,59.93 ; 1 cut-out
Net_75 on TOP (solid shape): 16.5,10.91 17.7,10.91 17.7,10.91 17.7,11.65 18.7,11.65 18.7,9.62 10.7,9.62 10.7,6.95 16.5,6.95 16.5,7.75 15.5,7.75 15.5,8.96 18.7,8.96 18.7,7.75 17.7,7.75 17.7,5.95 34.3,5.95 34.3,4.74 8.52,4.74 8.52,10.91 15.5,10.91 15.5,11.65 16.5,11.65

## Text on the board
Board Geometry/Soldermask Top: SWD | SIM | I2S_S | UART1 | SPI/HSPI | I2C | GPIO | I2S_M | I2C_1
Ref Des/Silkscreen Top: BOOT | POWER ON | W600_EV BOARD_V1.0 | B- | LED | G- | R- | PWM3 | PWM4 | PWM5 | PWM2 | PWM1 | CLK | DAT | VCC | GND | RST | SCL | SDA | SRL | TX | RX | CK | CS | DI | DO | +5V | 3V3 | PB8 | PB9 | PB10 | PB11 | PB12 | RT | CT | WAK | EXCK | NC | PA4 | PB7 | PA5 | PA1 | PB6 | UART1 | UART0 | USER
COMPVAL_TYPE_TOP: FIGURE | SIZE | 0.2032 | 0.3048 | 0.6 | 0.8999 | 0.9 | 0.8 | 2.3 | 1.0x0.7 | DRILL CHART: TOP to BOTTOM | ALL UNITS ARE IN MILLIMETERS | PLATED | NON-PLATED | QTY | 419 | 1 | 4 | 50 | 11 | 8
